# Altium PCB DVI_D_In.PcbDoc
Units mil, origin at the board's own origin, x right, y up, seen from the top; angles counter-clockwise.
Board outline 2004.6 x 2127 mil, 4 copper layers (Top Layer, Signal Layer 1, Signal Layer 2, Bottom Layer), stack 39.2 mil thick; 31 components, 57 nets, 267 pads, 90 vias.
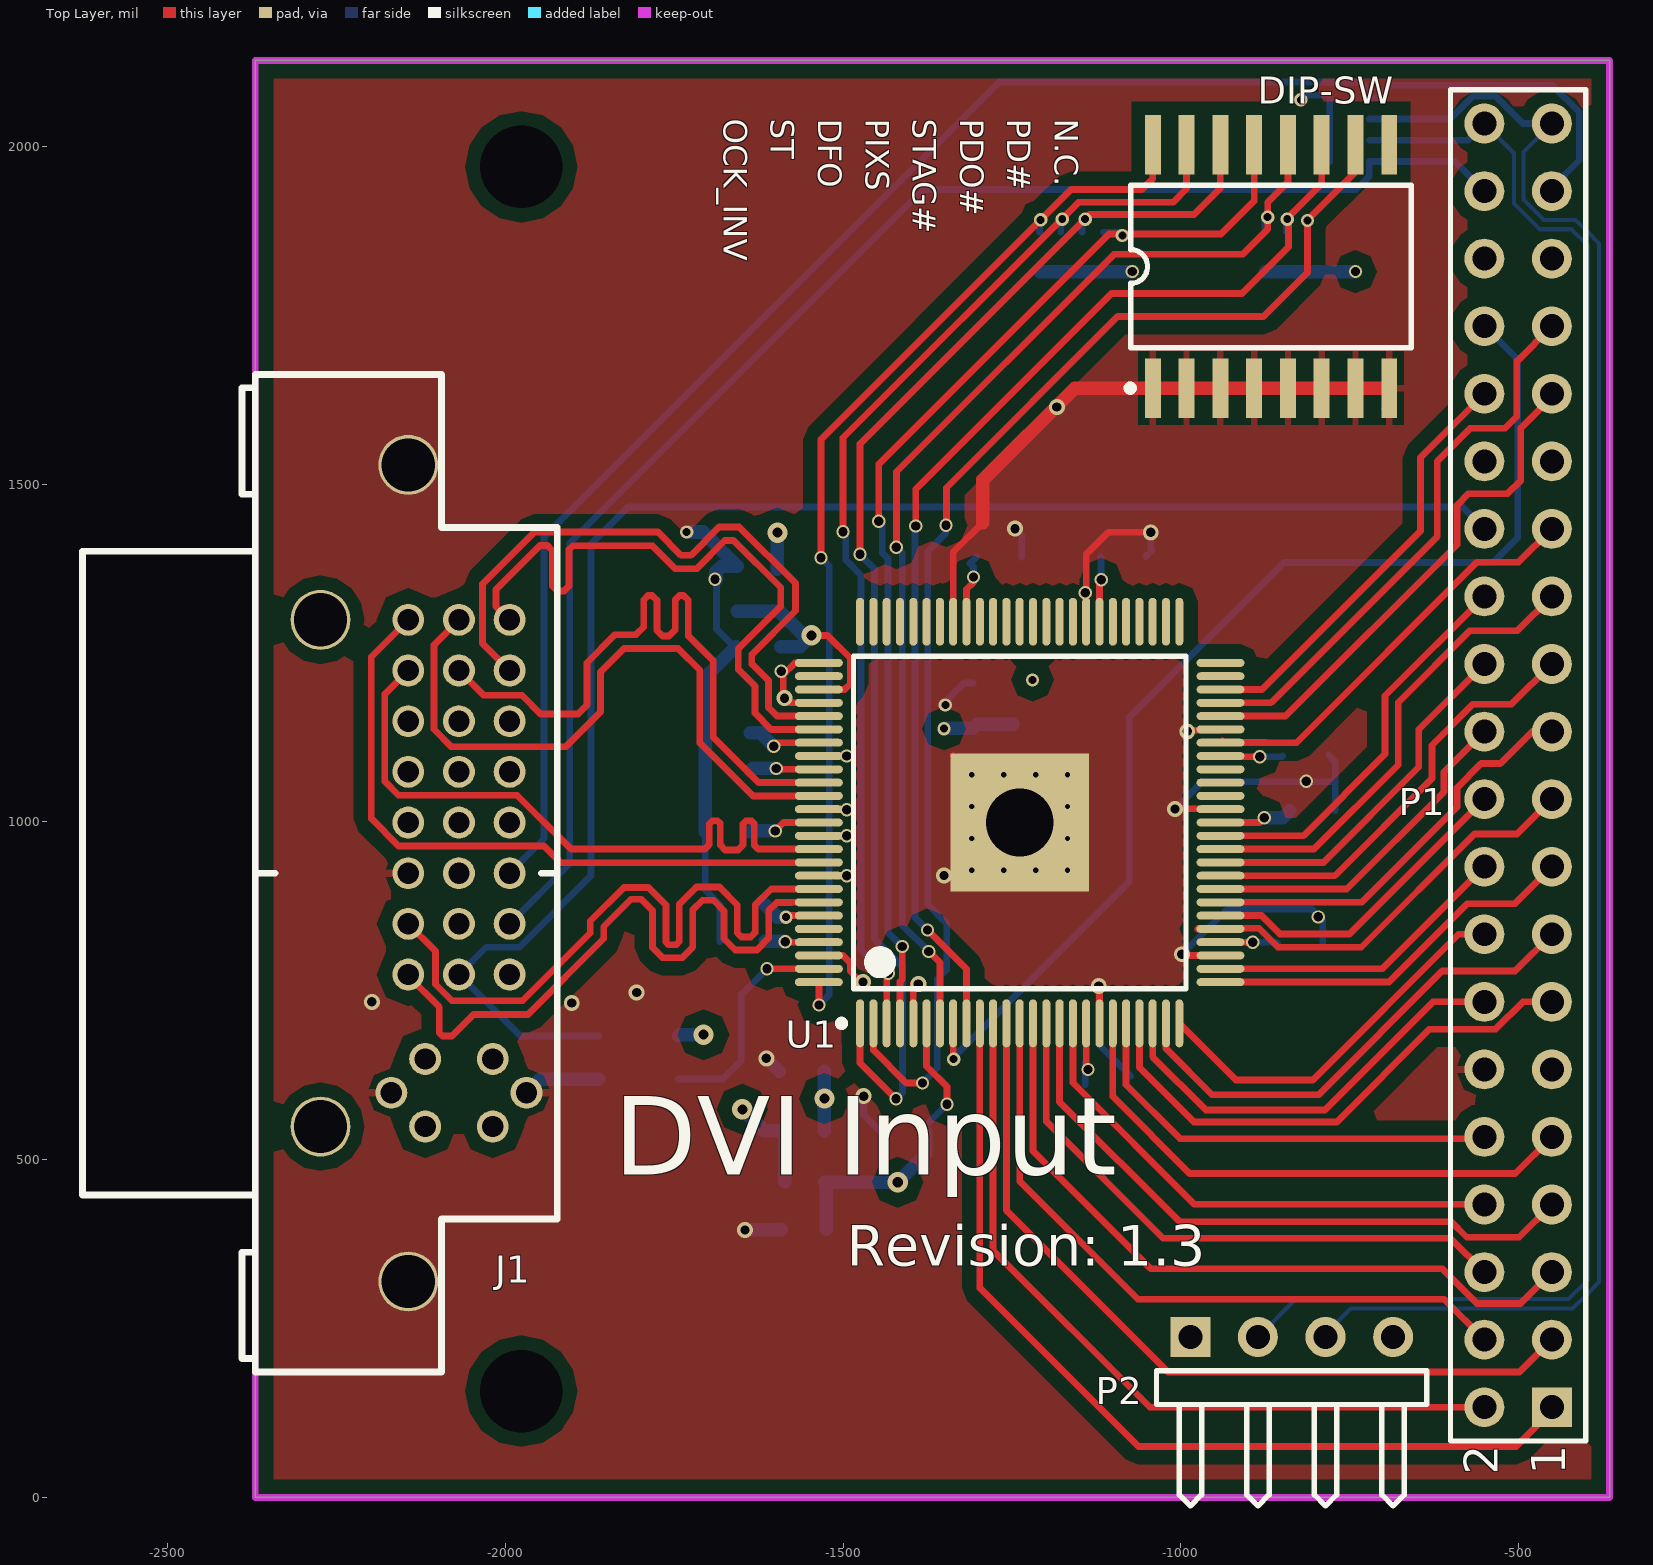
[diagram p0: Top Layer view]
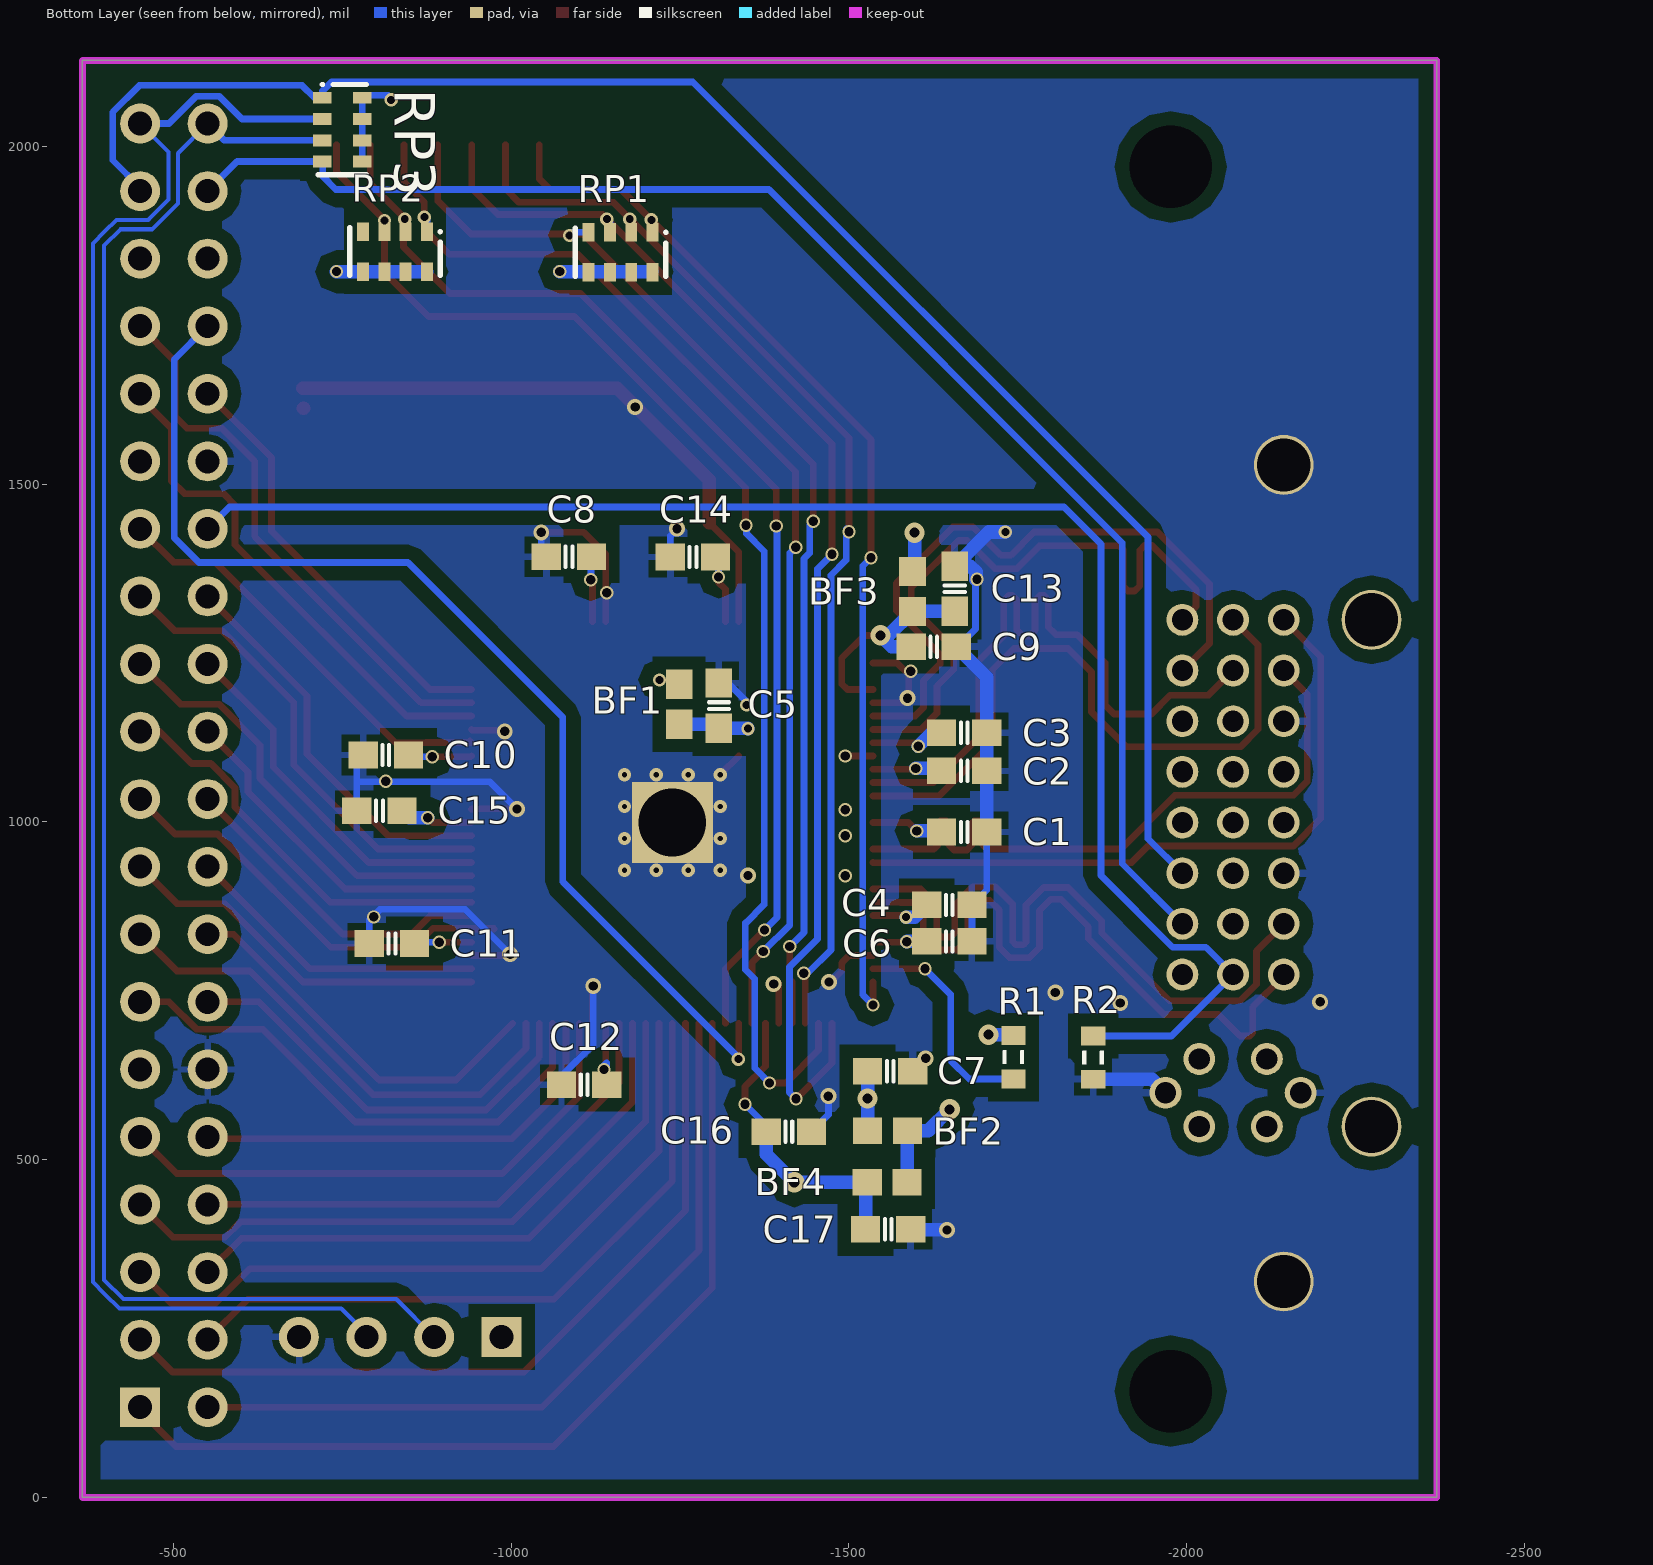
[diagram p1: Bottom Layer view, seen from below]
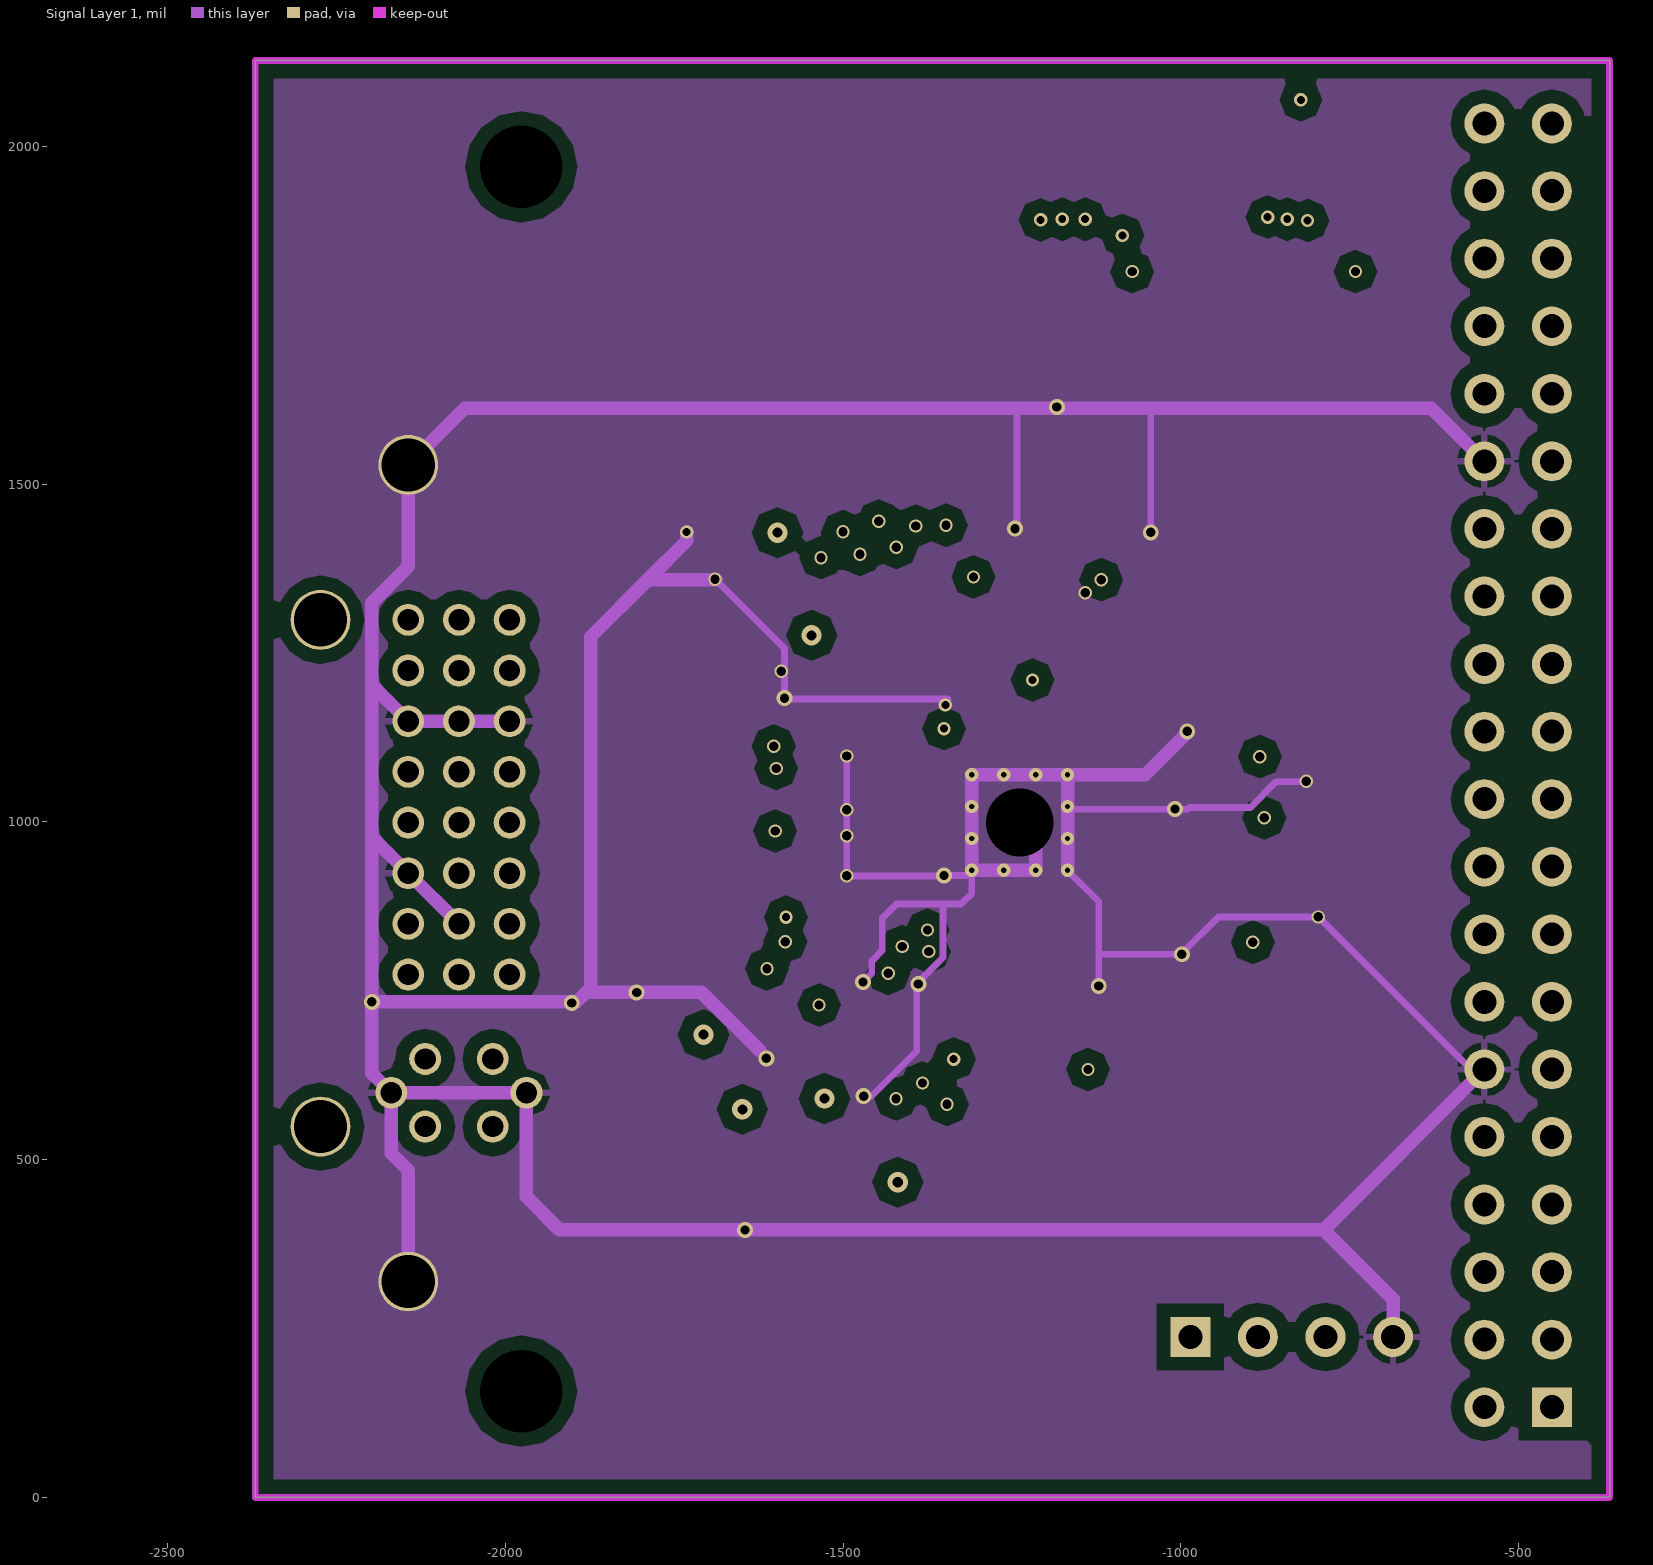
[diagram p2: Signal Layer 1]
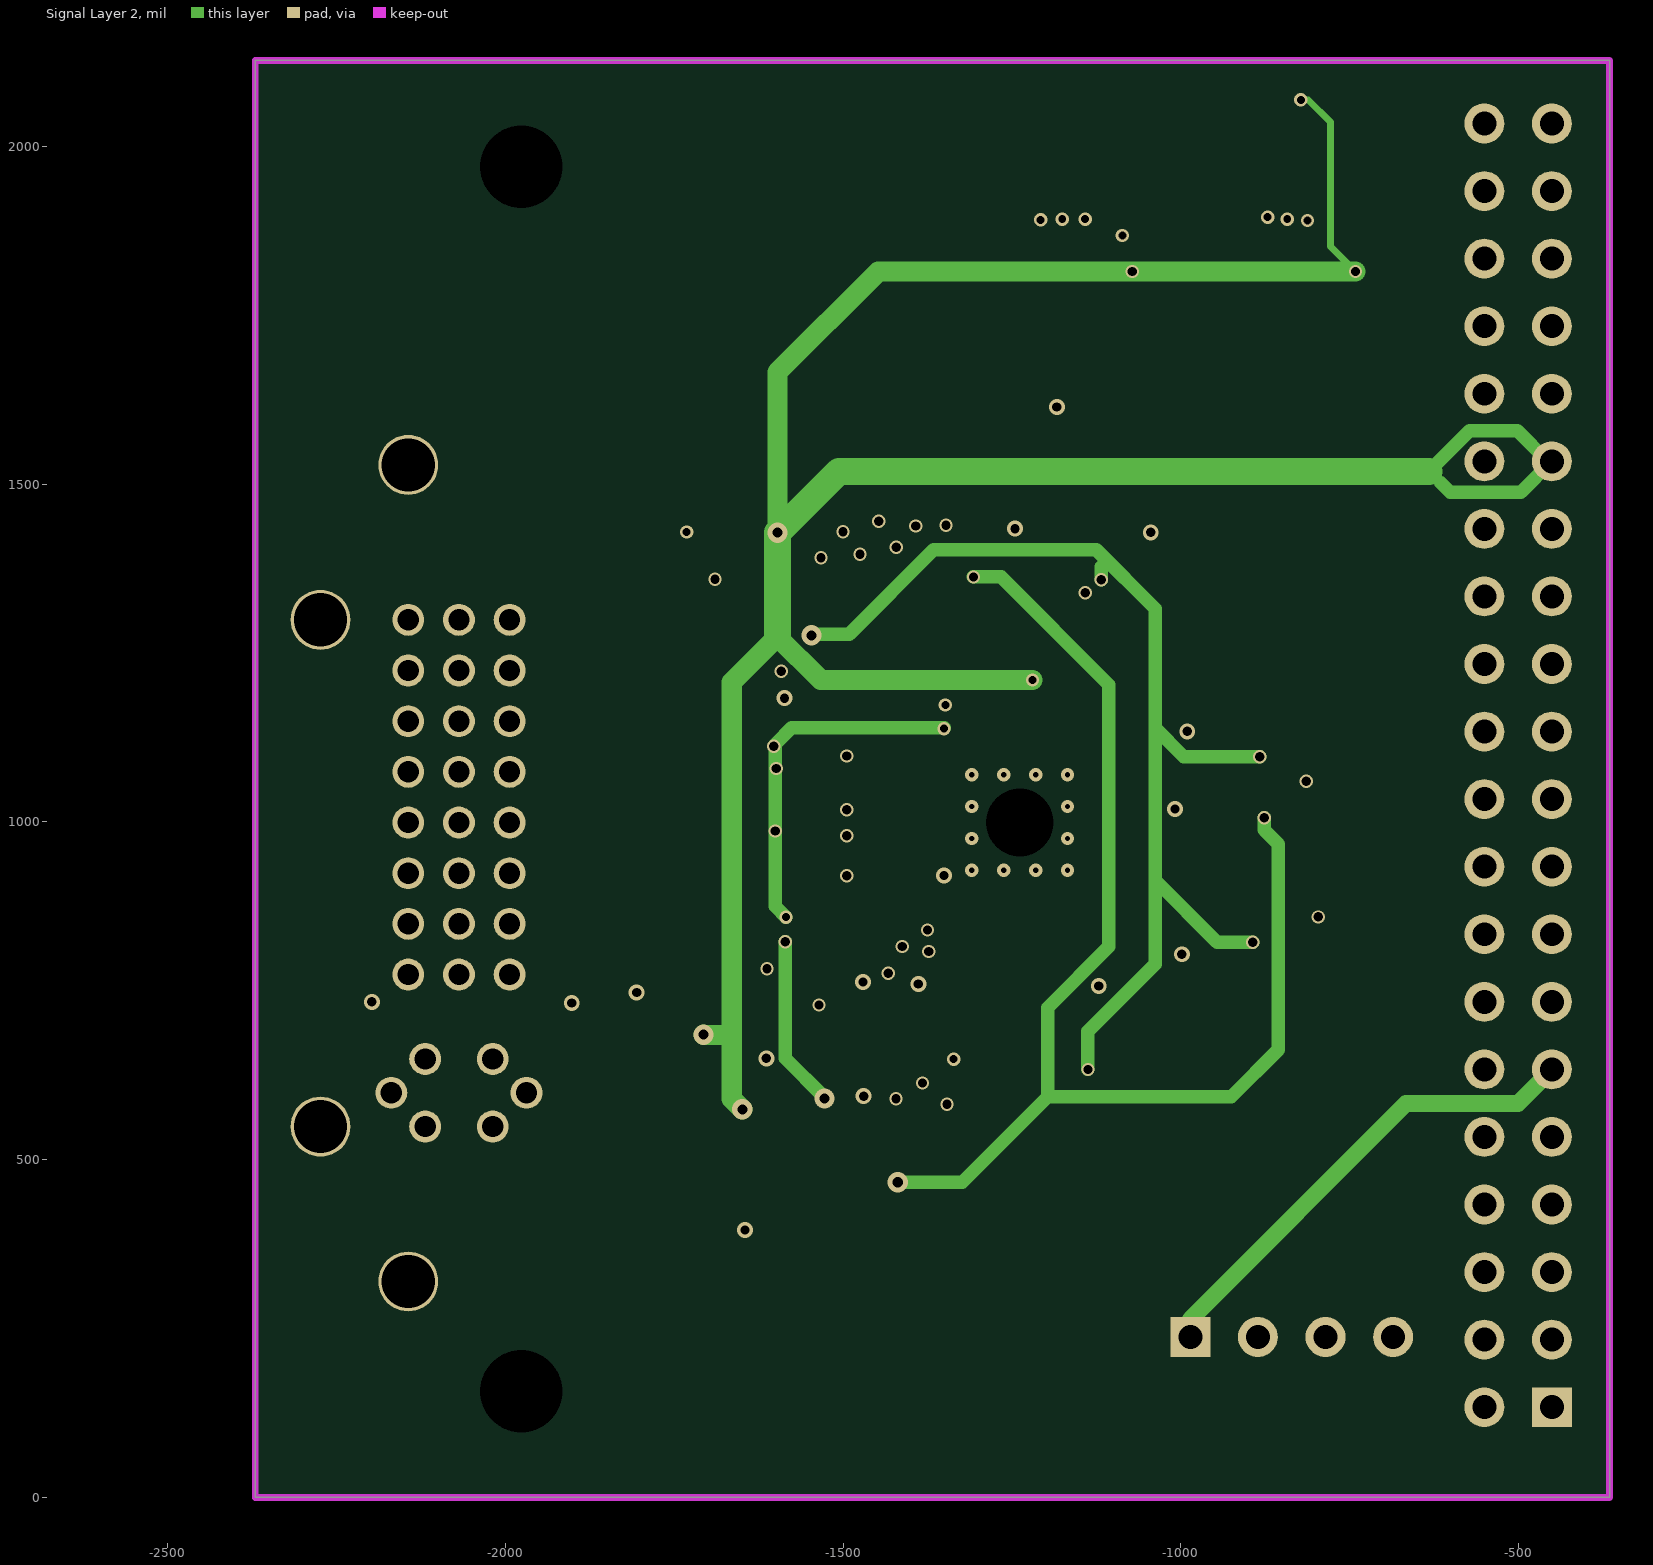
[diagram p3: Signal Layer 2]
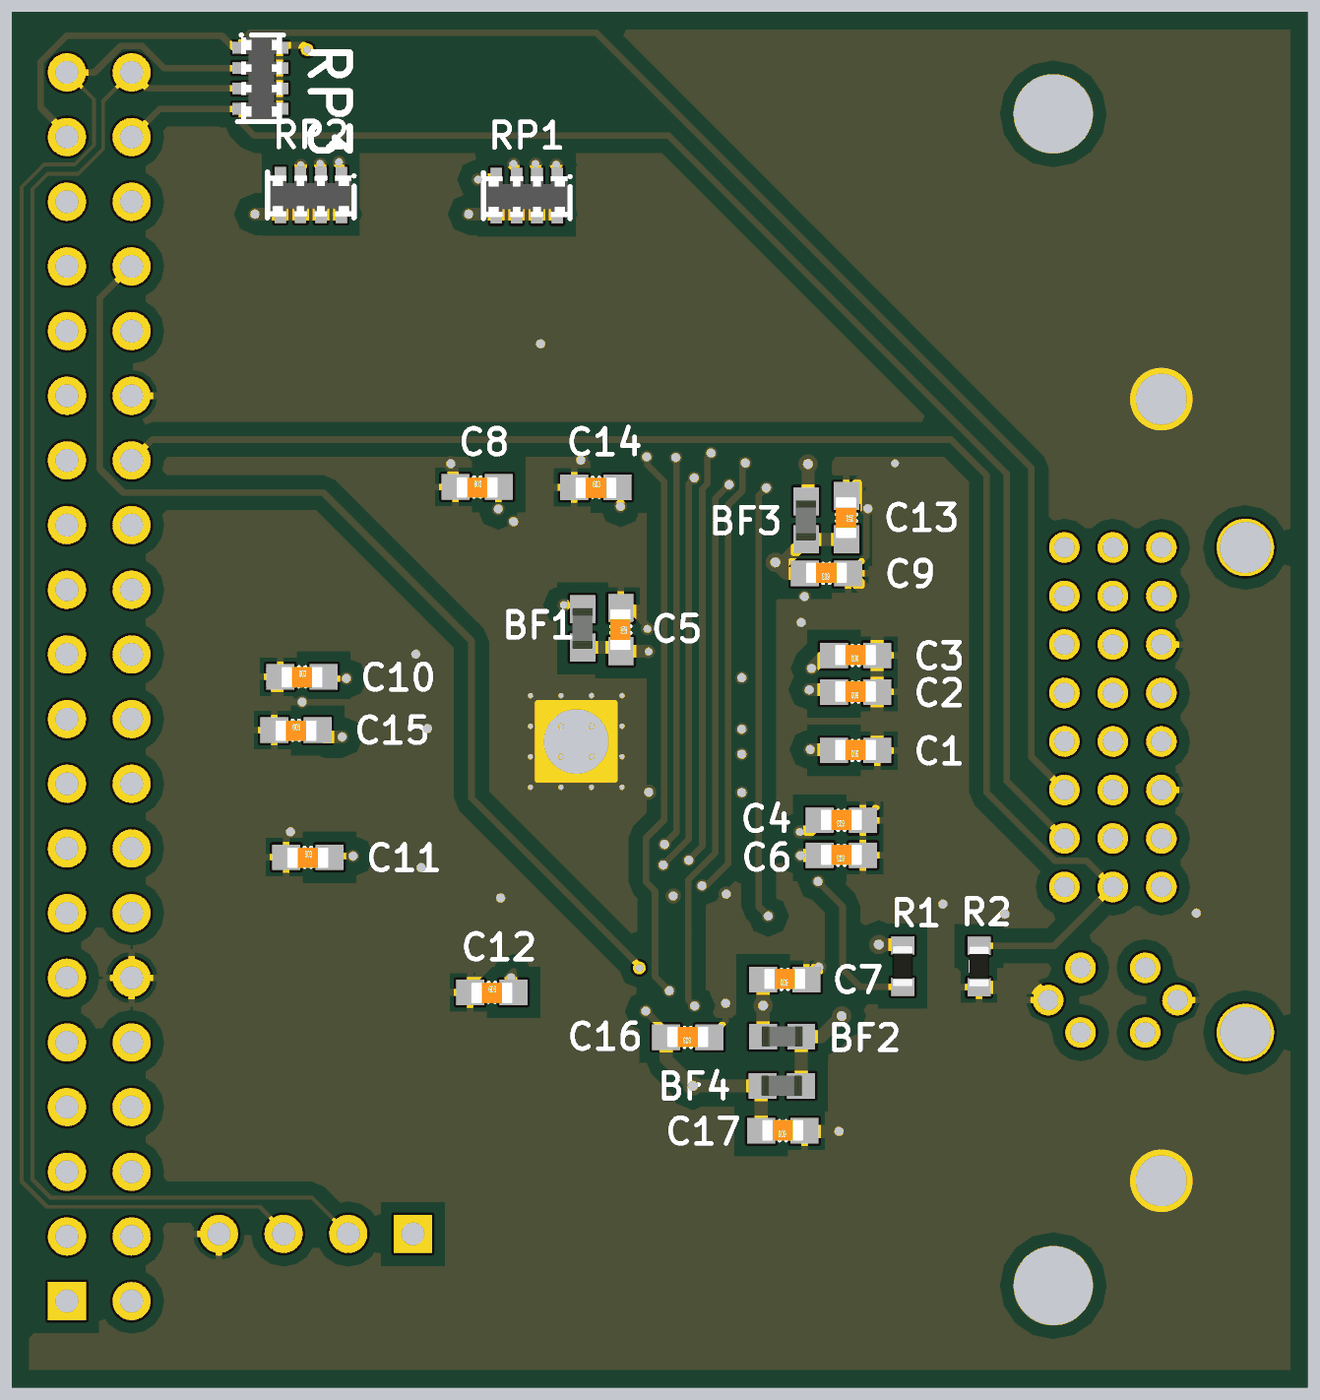
[diagram p4: 3D render of the assembled board from below, using the file's embedded part models]

## Layer stack, top to bottom
Top Solder: solder mask 0.4, Solder Resist, Dk 3.5
Top Layer: signal copper 1.4
Dielectric 1: core 15, FR-4, Dk 4.34
Signal Layer 1: signal copper 0.7
Dielectric 3: prepreg 5, Dk 4.2
Signal Layer 2: signal copper 0.7
Dielectric 2: core 15, FR-4, Dk 4.34
Bottom Layer: signal copper 1.4
Bottom Solder: solder mask 0.4, Solder Resist, Dk 3.5

## Board outline
-2370,0 -2370,2127 -365.4,2127 -365.4,0

## Design rules (kind name [scope] priority, off if disabled: settings)
Clearance "Poly and Signal" [InPoly] p1: gap=20
Clearance "Stitching GND" [IsStitchingVia and InNet('GND') vs (IsVia and (Not IsStitchingVia)) Or IsPad] p2: gap=5
Clearance [All] p3: gap=6
DiffPairsRouting [All] p1: maxlimit=10 minlimit=10 mostfreqgap=10 toplayer_minwidth=6 toplayer_maxwidth=15 toplayer_prefwidth=15 midlayer1_minwidth=6 midlayer1_maxwidth=15 midlayer1_prefwidth=15 midlayer2_minwidth=6 midlayer2_maxwidth=15 midlayer2_prefwidth=15 bottomlayer_minwidth=6 bottomlayer_maxwidth=15 bottomlayer_prefwidth=15 maxuncoupledlength=500
MinimumSolderMaskSliver [All] p1: minsoldermaskwidth=3
PolygonConnect PolygonConnect_2 [All vs IsVia  Or (IsPad And HoleSize > 50)] p1: connectstyle=Direct reliefconductorwidth=10 reliefentries=4 polygonreliefangle="90 Angle" airgapwidth=10
PolygonConnect [All] p2: connectstyle=Relief reliefconductorwidth=10 reliefentries=4 polygonreliefangle="90 Angle" airgapwidth=10
RoomDefinition DVI_D_In [InComponentClass('DVI_D_In')] p1 off: confinementstyle=ConfineIn formatcopy=TRUE lockcomponents=FALSE outline -3008.7,-44.4 572.9,-44.4 572.9,2356.5 -3008.7,2356.5
RoutingVias [All] p1: holewidth=28 width=50 viastyle="Through Hole" minholewidth=11.81 minwidth=19.68 maxholewidth=39.37 maxwidth=50
SilkToSilkClearance [All] p1: silktosilkclearance=6
SilkToSolderMaskClearance [IsPad] p1: minsilkscreentomaskgap=3 clearancetoexposedcopper=TRUE
SolderMaskExpansion [All] p1: expansion=4
Width Width_Diff [InNetClass('Diff')] p1: maxlimit=10 minlimit=10 preferedwidth=10 impedancedriven=TRUE minimp=50.000000 maximp=50.000000 favimp=50.000000
Width [All] p2: maxlimit=40 minlimit=6 preferedwidth=10
25 further rules are at their usual default settings.

## Classes and differential pairs
differential pair D2: +D2_P -D2_N
differential pair D1: +D1_P -D1_N
differential pair D0: +D0_P -D0_N
differential pair CLK: +CLK_P -CLK_N

## Components (designator, comment, footprint, x,y, rotation, side; value= is the part's Value field where it differs from the comment)
BF1 "GZ1608D121TF" L-1608[0603] -1248.5,1174 r270 bottom
BF2 "GZ1608D121TF" L-1608[0603] -1557,542.5 r0 bottom
BF3 "GZ1608D121TF" L-1608[0603] -1594,1341 r270 bottom
BF4 "GZ1608D121TF" L-1608[0603] -1556.5,466.5 r0 bottom
C1 "Cap Semi" C-1608[0603] -1670.5,985 r0 bottom
C2 "Cap Semi" C-1608[0603] -1670.5,1075.43 r0 bottom
C3 "Cap Semi" C-1608[0603] -1670.5,1132 r0 bottom
C4 "Cap Semi" C-1608[0603] -1648.5,877 r0 bottom
C5 "Cap Semi" C-1608[0603] -1307.5,1172 r270 bottom
C6 "Cap Semi" C-1608[0603] -1648.5,823 r0 bottom
C7 "Cap Semi" C-1608[0603] -1561,631 r0 bottom
C8 "Cap Semi" C-1608[0603] -1085.5,1392.5 r180 bottom
C9 "Cap Semi" C-1608[0603] -1625.5,1259 r0 bottom
C10 "Cap Semi" C-1608[0603] -814.5,1099 r180 bottom
C11 "Cap Semi" C-1608[0603] -823.5,820 r180 bottom
C12 "Cap Semi" C-1608[0603] -1108,611 r180 bottom
C13 "Cap Semi" C-1608[0603] -1656.5,1345 r270 bottom
C14 "Cap Semi" C-1608[0603] -1269,1392 r180 bottom
C15 "Cap Semi" C-1608[0603] -805,1016.5 r180 bottom
C16 "Cap Semi" C-1608[0603] -1411,541.5 r0 bottom
C17 "Cap Semi" C-1608[0603] -1558,397 r0 bottom
DIP-SW "DIP_SW" SO16W -866.5,1822 r0 top
J1 "DVI-I 24+5" DVI-I -2143.5,924 r90 top
P1 "DE2i_GPIO" HDR2X20 -450.8,133.6 r90 top
P2 "VGA_I2C" HDR1X4H -985.9,237.5 r0 top
R1 "Res_0603" RES_0603 -1743.5,651.5 r90 bottom
R2 "Res_0603" RES_0603 -1861.5,651 r90 bottom
RP1 "10K" R0603x4 -1162,1843 r0 bottom
RP2 "10K" R0603x4 -828,1844 r0 bottom
RP3 "10K" R0603x4 -750.1,2024.5 r270 bottom
U1 "TFP401APZP" PZP100-4700X4700TP_N -1238.5,999 r90 top

## Footprints (in the part's own frame and the unit in brackets; to place one, negate y for a bottom-side part, rotate by r counter-clockwise, add the part's x,y. Pads: shape width x height; smd on the part's side, far side on the other; paste and mask are expansions set on the pad)
C-1608[0603] [mm] "Chip Capacitor; Body 1.6 x 0.8 mm (LxW typ)"
  rect 1.1x1 smd: 1(-0.85,0) 2(0.85,0)
  silkscreen extent -0.13,-0.38 0.13,0.38, body extent -0.8,-0.42 0.8,0.38, height 0.29
DVI-I [mm]
  round 2.254 hole 2: 0(-15.35,0) 0(15.35,0) -1(-9.525,3.3) -1(9.525,3.3)
  round 1.2 hole 0.8: 1(9.525,-3.81) 2(7.62,-3.81) 3(5.715,-3.81) 4(3.81,-3.81) 5(1.905,-3.81) 6(0,-3.81) 7(-1.905,-3.81) 8(-3.81,-3.81) 9(9.525,-1.905) 10(7.62,-1.905) 11(5.715,-1.905) 12(3.81,-1.905) 13(1.905,-1.905) 14(0,-1.905) 15(-1.905,-1.905) 16(-3.81,-1.905) 17(9.525,0) 18(7.62,0) 19(5.715,0) 20(3.81,0) 21(1.905,0) 22(0,0) 23(-1.905,0) 24(-3.81,0) C1(-6.985,-3.175) C2(-9.525,-3.175) C3(-6.985,-0.635) C4(-9.525,-0.635) C5(-8.255,-4.445) C5(-8.255,0.635)
  silkscreen extent -18.75,-5.6 18.75,12.25
HDR1X4H [mm] "Connector; Header; 4 Position; Right Angle"
  rect 1.5x1.5 hole 0.9: 1(0,0)
  round 1.5 hole 0.9: 2(2.54,0) 3(5.08,0) 4(7.62,0)
  silkscreen extent -1.27,-6.35 8.89,-1.27
HDR2X20 [mm] "Connector; Header; 20x2 Position"
  rect 1.5x1.5 hole 0.9: 1(0,0)
  round 1.5 hole 0.9: 2(0,2.54) 3(2.54,0) 4(2.54,2.54) 5(5.08,0) 6(5.08,2.54) 7(7.62,0) 8(7.62,2.54) 9(10.16,0) 10(10.16,2.54) 11(12.7,0) 12(12.7,2.54) 13(15.24,0) 14(15.24,2.54) 15(17.78,0) 16(17.78,2.54) 17(20.32,0) 18(20.32,2.54) 19(22.86,0) 20(22.86,2.54) 21(25.4,0) 22(25.4,2.54) 23(27.94,0) 24(27.94,2.54) 25(30.48,0) 26(30.48,2.54) 27(33.02,0) 28(33.02,2.54) 29(35.56,0) 30(35.56,2.54) 31(38.1,0) 32(38.1,2.54) 33(40.64,0) 34(40.64,2.54) 35(43.18,0) 36(43.18,2.54) 37(45.72,0) 38(45.72,2.54) 39(48.26,0) 40(48.26,2.54)
  silkscreen extent -1.27,-1.27 49.53,3.81
L-1608[0603] [mm] "Chip Inductor, Body 1.6x0.8mm, IPC Medium Density"
  rect 1.1x1 smd: 1(-0.75,0) 2(0.75,0)
  body extent -0.8,-0.41 0.8,0.39, height 0.45
PZP100-4700X4700TP_N [mm] "Thin QFP, 100-Leads, Body 14x14mm, Pitch 0.5mm, Thermal Pad 5.2x5.2mm, IPC Medium Density"
  oval 1.8x0.3 smd: 1(-7.55,6) 2(-7.55,5.5) 3(-7.55,5) 4(-7.55,4.5) 5(-7.55,4) 6(-7.55,3.5) 7(-7.55,3) 8(-7.55,2.5) 9(-7.55,2) 10(-7.55,1.5) 11(-7.55,1) 12(-7.55,0.5) 13(-7.55,0) 14(-7.55,-0.5) 15(-7.55,-1) 16(-7.55,-1.5) 17(-7.55,-2) 18(-7.55,-2.5) 19(-7.55,-3) 20(-7.55,-3.5) 21(-7.55,-4) 22(-7.55,-4.5) 23(-7.55,-5) 24(-7.55,-5.5) 25(-7.55,-6) 51(7.55,-6) 52(7.55,-5.5) 53(7.55,-5) 54(7.55,-4.5) 55(7.55,-4) 56(7.55,-3.5) 57(7.55,-3) 58(7.55,-2.5) 59(7.55,-2) 60(7.55,-1.5) 61(7.55,-1) 62(7.55,-0.5) 63(7.55,0) 64(7.55,0.5) 65(7.55,1) 66(7.55,1.5) 67(7.55,2) 68(7.55,2.5) 69(7.55,3) 70(7.55,3.5) 71(7.55,4) 72(7.55,4.5) 73(7.55,5) 74(7.55,5.5) 75(7.55,6)
  oval 0.3x1.8 smd: 26(-6,-7.55) 27(-5.5,-7.55) 28(-5,-7.55) 29(-4.5,-7.55) 30(-4,-7.55) 31(-3.5,-7.55) 32(-3,-7.55) 33(-2.5,-7.55) 34(-2,-7.55) 35(-1.5,-7.55) 36(-1,-7.55) 37(-0.5,-7.55) 38(0,-7.55) 39(0.5,-7.55) 40(1,-7.55) 41(1.5,-7.55) 42(2,-7.55) 43(2.5,-7.55) 44(3,-7.55) 45(3.5,-7.55) 46(4,-7.55) 47(4.5,-7.55) 48(5,-7.55) 49(5.5,-7.55) 50(6,-7.55) 76(6,7.55) 77(5.5,7.55) 78(5,7.55) 79(4.5,7.55) 80(4,7.55) 81(3.5,7.55) 82(3,7.55) 83(2.5,7.55) 84(2,7.55) 85(1.5,7.55) 86(1,7.55) 87(0.5,7.55) 88(0,7.55) 89(-0.5,7.55) 90(-1,7.55) 91(-1.5,7.55) 92(-2,7.55) 93(-2.5,7.55) 94(-3,7.55) 95(-3.5,7.55) 96(-4,7.55) 97(-4.5,7.55) 98(-5,7.55) 99(-5.5,7.55) 100(-6,7.55)
  rect 5.2x5.2 / inner rect 0x0 / far side rect 3.048x3.048 hole 2.54: 101(0,0)
  silkscreen extent -7.67,-6.25 6.25,6.82, body extent -7,-7 7,7, height 1.2
R0603x4 [mm] "Chip Resistor Array, (0603x4); SM; 8 Leads; Body 3.40 x 1.80 mm (LxW max)"
  rect 0.45x0.7 smd: 1(-1.2,-0.75) 2(-0.4,-0.75) 3(0.4,-0.75) 4(1.2,-0.75) 5(1.2,0.75) 6(0.4,0.75) 7(-0.4,0.75) 8(-1.2,0.75)
  silkscreen extent -1.75,-0.9 1.7,0.9, body extent -1.6,-0.76 1.6,0.84, height 0.65
RES_0603 [mil]
  rect 28x36 smd: 1(-32,0) 2(32,0)
  silkscreen extent -10,-16 10,16, body extent -31,-16 32,16, height 20
SO16W [mm] "Small Outline; 16 Leads; Body Width 7.5 mm; Pitch 1.27 mm"
  rect 0.6x2.25 smd: 1(-4.445,-4.575) 2(-3.175,-4.575) 3(-1.905,-4.575) 4(-0.635,-4.575) 5(0.635,-4.575) 6(1.905,-4.575) 7(3.175,-4.575) 8(4.445,-4.575) 9(4.445,4.575) 10(3.175,4.575) 11(1.905,4.575) 12(0.635,4.575) 13(-0.635,4.575) 14(-1.905,4.575) 15(-3.175,4.575) 16(-4.445,4.575)
  silkscreen extent -5.42,-4.7 5.27,3.05

## Part data
BF1 BF2 BF3 BF4: library part Inductor
C1 C2 C3 C4 C5 C6 C7 C8 C9 C10 C11 C12 C13 C14 C15 C16 C17: "Capacitor (Semiconductor SIM Model)"
J1: library part DVI-I
P1: library part "Header 20X2", "Header, 20-Pin, Dual row"
P2: library part "Header 4H", "Header, 4-Pin, Right Angle"
R1 R2: "Resistor"
RP1 RP2 RP3: library part RPACK4
U1: library part CMP-0325-00069-1, "PanelBus DVI Receiver 165 MHz, HSYNC Fix with 3 Data Channels, 3.3 V, 0 to +70 degC, 100-pin HTQFP (PZP), Green (RoHS & no Sb/Br)"

## Free pads (board coordinates)
  round 0 hole 122.05: 0(-1976.3,157.48) 0(-1976.3,1969.52)

## Via types
v1: diameter 19.68, hole 13.78, Top Layer to Bottom Layer, 37 vias
v2: diameter 23.62, hole 13.78, Top Layer to Bottom Layer, 17 vias
v3: diameter 19.68, hole 7.87, Top Layer to Bottom Layer, 16 vias
v4: diameter 19.68, hole 11.81, Top Layer to Bottom Layer, 14 vias
v5: diameter 30, hole 15, Top Layer to Bottom Layer, 6 vias

## Nets (pads, with @x,y where several pads share a name; then routed paths per layer and width w, separated by ;. In a path a pad name is that pad's centre, name@x,y a point inside that pad or via, vN(x,y) a via of type N, cw(c..) or ccw(c..) an arc to the next point about the centre after c; other vN are vias at no path point)
+3.3V: BF1.1 BF2.1 BF3.1 BF4.1 P1.29 R1.2 RP1.5 RP1.6 RP1.7 RP1.8 RP2.5 RP2.6 RP2.7 RP2.8 RP3.5 RP3.6 RP3.7 RP3.8 | length 4847.7
  Signal Layer 2 w10: v4(-822.3,2068.7) -811.4,2068.7 -778.6,2035.9 -778.6,1851.6 v1(-741.47,1814.47)
  Signal Layer 2 w20: -632.7,1518.9 -572.47,1579.13 -502.23,1579.13 -456.7,1533.6 P1.29 -496.6,1487.8 -601.2,1487.8 -615.2,1501.8
  Signal Layer 2 w30: v5(-1706.5,685) -1706,684.5 -1664.5,684.5 ; v5(-1649,574.5) -1664.5,590 -1664.5,684.5 ; v5(-1597,1428) -1597,1665.5 -1448.03,1814.47 v1(-1072.03,1814.47) v1(-741.47,1814.47) ; v4(-1219.5,1210) -1533,1210 -1597,1274 -1664.5,1206.5 -1664.5,684.5
  Signal Layer 2 w40: -1597,1274 v5(-1597,1428) -1506.1,1518.9 -632.7,1518.9
  Bottom Layer w10: v4@-818.2,2075.5 -783.38,2075.5 RP3.8 RP3.7 RP3.6 RP3.5
  Bottom Layer w20: R1.2 -1742,685 v5(-1706.5,685) ; v5(-1649,574.5) -1617,542.5 BF2.1 BF4.1@-1586.53,467 ; BF3.1@-1597,1373.53 v5(-1597,1428) ; RP1.8@-1208.24,1814.47 v1(-1072.03,1814.47) ; RP2.8 RP2.7 RP2.6 RP2.5 v1(-741.47,1814.47)
+5V: P1.11 P2.1 | length 714.6
  Signal Layer 2 w25: P2.1 -985.9,263.8 -666.5,583.2 -501.2,583.2 P1.11
AVDD: BF1.2 C1.2 C2.2 C3.2 C4.2 C5.2 U1.82 U1.84 U1.88 U1.95 | length 1035.1
  Top Layer w10: v1@-1602.5,1117.11 U1.82 ; v1(-1600.5,986.5) -1588,999 U1.88 ; v1(-1599,1079) -1597.74,1077.74 U1.84 ; v4(-1584.5,859) -1582.3,861.2 U1.95
  Signal Layer 2 w20: v4(-1584.5,859) -1600.5,875 v1(-1600.5,986.5) -1600.5,1115 -1576,1139.5 v4@-1350.5,1139.5
  Bottom Layer w20: C1.2 -1635.54,986.5 v1(-1600.5,986.5) ; C2.2 -1633.46,1079 v1(-1599,1079) ; C3.2 -1622.5,1132 v1(-1602.5,1112) ; C4.2 -1597.04,859 v4(-1584.5,859) ; v4(-1350.5,1138) -1349.97,1138.54 C5.2 -1301.56,1144.47 BF1.2
B0: P1.1 U1.10 | length 1362.8
  Top Layer w10: U1.10 -1297.56,310.08 -1062.88,75.4 -503.8,75.4 -450.8,128.4 P1.1
B1: P1.2 U1.11 | length 1159.4
  Top Layer w10: U1.11 -1277.87,365.47 -1046,133.6 P1.2
B2: P1.3 U1.12 | length 1203
  Top Layer w10: U1.12 -1258.19,424.99 -1019,185.8 -498.6,185.8 P1.3
B3: P1.4 U1.13 | length 1018.3
  Top Layer w10: U1.13 -1238.5,468.5 -1063.37,293.37 -610.57,293.37 P1.4
B4: P1.5 U1.14 | length 1069.6
  Top Layer w10: U1.14 -1218.82,512.82 -1044.62,338.62 -613.14,338.62 -561.71,287.2 -497.2,287.2 P1.5
B5: P1.6 U1.15 | length 885.8
  Top Layer w10: U1.15 -1199.13,556.63 -1026.03,383.53 -600.73,383.53 P1.6
B6: P1.7 U1.16 | length 948
  Top Layer w10: U1.16 -1179.45,585.44 -1002.2,408.2 -599.9,408.2 -576.8,385.1 -499.3,385.1 P1.7
B7: P1.8 U1.17 | length 771.5
  Top Layer w10: U1.17 -1159.76,613.81 -979.77,433.82 -551.02,433.82 P1.8
CLK_N: J1.24 U1.94 | length 1006.6
  Top Layer w10: J1.24 -2143.5,771.75 -2097.5,725.75 -2097.5,687.68 -2092.82,683 -2078.98,683 -2046.98,715 -1966.22,715 -1854.11,827.11 -1854.11,844.89 -1813.5,885.5 -1798.79,885.5 -1782,868.72 -1782,813.72 -1767.29,799 -1737.72,799 -1722.5,814.22 -1722.5,869.5 -1708,884 -1691.79,884 -1676,868.22 -1676,827 -1659.5,810.5 -1627.5,810.5 -1610,828 -1610,868.73 -1598,880.73 -1576.34,880.73 -1576.18,880.89 U1.94
CLK_P: J1.23 U1.93 | length 1006.8
  Top Layer w10: J1.23 -2103.12,808.62 -2103.12,759.66 -2078.61,735.14 -1974.36,735.14 -1874.11,835.39 -1874.11,853.18 -1824.29,903 -1788,903 -1762,877 -1762,822 -1758,818 -1747,818 -1742.5,822.5 -1742.5,877.78 -1716.79,903.5 -1683,903.5 -1656.5,877 -1656.5,835.78 -1650.43,829.72 -1636.57,829.72 -1630,836.28 -1630,877.02 -1606.29,900.73 -1576.34,900.73 -1576.18,900.57 U1.93
D0_N: J1.17 U1.91 | length 1006.4
  Top Layer w10: J1.17 -2198.12,1244.38 -2198.12,1004.66 -2157.84,964.38 -1942.88,964.38 -1918.13,939.63 -1536.06,939.63 U1.91
D0_P: J1.18 U1.90 | length 1006.5
  Top Layer w10: J1.18 -2178.12,1189.38 -2178.12,1059.66 -2157.84,1039.38 -1982.38,1039.38 -1902.63,959.63 -1704.5,959.63 -1698.13,966 -1698.13,997 ; -1698,997 -1693.5,1001.5 -1685.5,1001.5 -1681.57,997.57 ; -1681.63,997.5 -1681.63,965.5 -1674.63,958.5 -1655.5,958.5 -1648,966 -1648,997 -1643.5,1001.5 -1635.5,1001.5 -1631.5,997.5 -1631.5,965.5 -1625.63,959.63 U1.90
D1_N: J1.9 U1.86 | length 1006.4
  Top Layer w10: J1.9@-2068.31,1298.81 J1.9 -2105.5,1262 -2105.5,1137.04 -2079.46,1111 -1910.72,1111 -1859,1162.72 -1859,1221.72 -1824.22,1256.5 -1744,1256.5 -1711.93,1224.43 -1711.93,1116.86 -1633.29,1038.21 -1576.34,1038.21 -1576.18,1038.37 U1.86
D1_P: J1.10 U1.85 | length 1006.4
  Top Layer w10: J1.10 -2032,1187.5 -1975.5,1187.5 -1947.64,1159.64 -1892.14,1159.64 -1879,1172.78 -1879,1235.5 -1837.5,1277 -1806.5,1277 -1795,1288.5 -1795,1328.5 -1788.5,1335 -1782.5,1335 -1775.5,1328 ; -1775.5,1328.5 -1775.5,1328 ; U1.85 -1576.18,1058.06 -1576.34,1058.21 -1590.31,1058.21 -1590.37,1058.16 -1607.63,1058.16 -1607.69,1058.21 -1625,1058.21 -1691.93,1125.14 -1691.93,1237.93 -1729,1275 -1729,1328 -1736,1335 -1742,1335 -1748.5,1328.5 -1748.5,1284 -1757.5,1275 -1767,1275 -1775.5,1283.5 -1775.5,1328
D2_N: J1.1 U1.81 | length 1006.6
  Top Layer w10: J1.1 -2013.5,1319 -2013.5,1344 -1948.5,1409 -1937.5,1409 -1930.5,1402 -1930.5,1349.5 -1922.75,1341.75 -1912.75,1341.75 -1905.5,1349 -1905.5,1403 -1900,1408.5 -1781.79,1408.5 -1747.79,1374.5 -1717,1374.5 -1675,1416.5 -1662,1416.5 -1592,1346.5 -1592,1319.28 -1655,1256.28 -1655,1225.5 -1630.3,1200.8 -1630.3,1160.8 -1606.3,1136.8 U1.81
D2_P: J1.2 U1.80 | length 1006.6
  Top Layer w10: J1.2 -2033.5,1264 -2033.5,1352.28 -1956.79,1429 -1774,1429 -1739.5,1394.5 -1725.29,1394.5 -1683.29,1436.5 -1653.72,1436.5 -1570.5,1353.28 -1570.5,1312.5 -1635,1248 -1635,1233.78 -1610.3,1209.08 -1610.3,1169.08 -1598.01,1156.8 U1.80@-1535.75,1156.8
DE: P1.31 U1.46 | length 770.6
  Top Layer w10: U1.46 -844.94,1156.48 -591.33,1410.09 -591.33,1468.47 -574.1,1485.7 -516.2,1485.7 -496.7,1505.2 -496.7,1583.17 -450.8,1629.07 P1.31
DFO: DIP-SW.14 RP1.3 U1.1 | length 1900
  Top Layer w10: v1(-1475,1396) -1475,1559.5 v4@-1142,1892.5 ; U1.1 -1474.72,643.22 v1(-1421.5,590) ; v4@-1135.5,1899 -980.5,1899 -941.5,1938 DIP-SW.14
  Bottom Layer w10: v1(-1475,1396) -1453.5,1374.5 -1453.5,826.5 -1412,785 -1412,599.5 v1(-1421.5,590) ; RP1.3 -1146.25,1887.25 v4(-1141.5,1892)
DVDD: BF4.2 C14.2 C15.2 C16.2 C17.2 U1.6 U1.38 U1.67 | length 2579.8
  Top Layer w10: U1.6 -1376.3,638.3 -1346,608 v1(-1346,582) ; U1.67 -1317.24,1344.26 -1307,1354.5 v1(-1307,1362.5) ; U1.38 -883.5,999 v1(-876.5,1006)
  Signal Layer 2 w20: v5(-1419,466.5) -1323.5,466.5 -1197,593 ; v1(-1307,1362.5) -1266,1362.5 -1106.5,1203 -1106.5,815.5 -1197,725 -1197,593 ; v1(-876.5,1006) -876.5,988 -855.5,967 -855.5,663 -925.5,593 -1197,593
  Bottom Layer w10: C16.2 -1377.54,550.46 v1(-1346,582) ; v1(-1307,1362.5) -1307,1377.46 -1312,1382.46 C14.2
  Bottom Layer w20: BF4.2 v5(-1419,466.5) -1377.54,507.96 C16.2 ; C17.2 BF4.2@-1524.54,464.06 ; v1(-876.5,1006) -848.97,1006 C15.2
G0: P1.9 U1.20 | length 828
  Top Layer w10: U1.20 -1100.71,593.21 -986.9,479.4 -505,479.4 P1.9
G1: P1.10 U1.21 | length 655.3
  Top Layer w10: U1.21 -1081.02,610.82 -1001.2,531 -553.4,531 P1.10
G2: P1.13 U1.22 | length 783
  Top Layer w10: U1.22 -1061.34,636.33 -980.8,555.8 -769.12,555.8 -631.85,693.07 -534.01,693.07 -493.49,733.6 P1.13
G3: P1.14 U1.23 | length 639.3
  Top Layer w10: U1.23 -1041.65,652.15 -963.05,573.55 -786.87,573.55 -626.82,733.6 P1.14
G4: P1.15 U1.24 | length 735.2
  Top Layer w10: U1.24 -1021.97,664.46 -953.5,596 -796.42,596 -613.22,779.2 -505.2,779.2 P1.15
G5: P1.16 U1.25 | length 575.4
  Top Layer w10: U1.25 -918.56,618.04 -804.66,618.04 -589.1,833.6 P1.16
G6: P1.17 U1.26 | length 561.2
  Top Layer w10: U1.26 -691.92,762.78 -575.8,878.9 -505.5,878.9 P1.17
G7: P1.18 U1.27 | length 453.1
  Top Layer w10: U1.27 -701.94,782.46 P1.18
GND: C1.1 C2.1 C3.1 C4.1 C5.1 C6.1 C7.1 C8.1 C9.1 C10.1 C11.1 C12.1 C13.1 C14.1 C15.1 C16.1 C17.1 DIP-SW.1 DIP-SW.2 DIP-SW.3 DIP-SW.4 DIP-SW.5 DIP-SW.6 DIP-SW.7 DIP-SW.8 J1.0 J1.3 J1.11 J1.15 J1.19 J1.22 J1.C5 P1.12 P1.30 P2.4 R2.1 U1.5 U1.19 U1.28 U1.39 U1.45 U1.58 U1.68 U1.76 U1.79 U1.83 U1.87 U1.89 U1.92 U1.98 U1.101 | length 14466.3
  Top Layer w10: U1.98 -1500.15,802.15 -1490.5,792.5 -1490.5,791.85 -1489.31,790.66 -1489.31,778.81 -1473.5,763 v2(-1470.5,763) ; U1.83 v1(-1494.5,1097.43) ; U1.79 -1579.67,1176.17 v2(-1586.5,1183) -1588.5,1185 -1588.5,1218 -1571.28,1235.22 U1.76 ; U1.5 -1395.98,760.52 -1395.5,761 v2@-1391,761 ; v2@-1350.74,920.26 v2(-1350.5,920.5) ; U1.101@-1336.93,1097.43 v3(-1309.37,1069.87) ; U1.68 -1336.93,1399.07 -1293,1443 ; U1.101@-1313.3,979.32 v3(-1309.37,975.38) ; U1.101@-1313.3,1018.68 v3(-1309.37,1022.62) ; U1.58 -1140.08,1395.93 -1107.5,1428.5 v2(-1044.5,1428.5) ; v2@-1121.5,760.5 -1120.39,759.39 U1.19 ; v2@-1008.5,1019.5 -942.07,1019.5 U1.39 ; v2@-999.5,804 -997.65,802.15 U1.28 ; v2@-990.5,1135.5 -942.55,1135.5 U1.45
  Top Layer w20: -1293,1443 -1293,1506 -1157.12,1641.88 DIP-SW.1 DIP-SW.2 DIP-SW.3 DIP-SW.4 DIP-SW.5 DIP-SW.6 DIP-SW.7 DIP-SW.8 ; DIP-SW.8@-693,1612 DIP-SW.8@-692.5,1612.5
  Signal Layer 1 w10: v1@-1688,1358 -1586.5,1256.5 v2(-1586.5,1183) -1585.5,1182 -1344.5,1182 -1348.5,1178 v4(-1348.5,1173) ; v1(-1494.5,1097.43) v1(-1494.5,1018) v1(-1494.5,979.32) v1(-1494.5,920) -1351,920 v2(-1350.5,920.5) -1317,920.5 v3(-1309.37,928.13) -1309.37,894.13 -1325.16,878.34 -1420.66,878.34 -1442,857 -1442,809.68 -1457.34,794.34 -1457.34,776.16 v2(-1470.5,763) ; v2(-1469.5,594) -1457.5,594 -1391,660.5 -1391,761 -1390.53,761 -1352.16,799.37 -1352.16,873.34 ; v2(-1245.5,1434) -1245.5,1433 -1242.5,1430 -1242.5,1612 ; v3(-1167.63,928.13) -1121.5,882 -1121.5,804 ; v3@-1160.82,1018.68 -989.69,1018.68 -987.03,1021.34 -897.16,1021.34 -859,1059.5 v1@-816,1059.5 ; v2(-1121.5,757) -1121.5,804 ; v2(-1044.5,1428.5) -1044.5,1609 -1043,1610.5 -1043,1612 ; P1.12 -570.8,633.6 v1(-796.5,859.3) -944.2,859.3 -999.5,804 -1121.5,804
  Signal Layer 1 w20: J1.0@-2143.5,319.67 -2143.5,484.5 -2168.5,509.5 J1.C5@-2168.5,599 ; J1.15 J1.22 -2197.5,978 ; J1.3 J1.11 J1.19 -2197.5,1203 ; -1873.5,752 -1873.5,1274 -1789.5,1358 ; v4(-1731.5,1429) -1731.5,1416 -1789.5,1358 ; v1@-1688,1358 -1789.5,1358 ; -1623,661 -1709.5,747.5 v2(-1805.5,747.5) -1880,747.5 -1894,733.5 v2(-2197.5,733.5) ; v3(-1262.12,975.38) v3(-1262.12,1022.62) v3(-1214.88,1022.62) v3(-1214.88,975.38) v3(-1214.88,928.13) v3(-1262.12,928.13) v3(-1309.37,928.13) v3(-1309.37,975.38) v3(-1309.37,1022.62) v3(-1309.37,1069.87) v3(-1262.12,1069.87) v3(-1214.88,1069.87) v3(-1167.63,1069.87) ; v3(-1167.63,928.13) v3(-1167.63,975.38) v3(-1167.63,1022.62) v3(-1167.63,1069.87) ; v2(-990.5,1134) -990.5,1132 -1052.63,1069.87 v3(-1167.63,1069.87) ; P2.4 -685.9,293.5 -788.4,396 ; P1.12 -788.4,396 ; P1.30 -629.2,1612 -1043,1612 -1242.5,1612 -2059.83,1612 -2143.5,1528.33 -2143.5,1378 -2197.5,1324 -2197.5,1203 ; v2(-2197.5,733.5) -2197.5,978 ; v2(-2197.5,733.5) -2197.5,628 J1.C5@-2168.5,599 ; -2197.5,978 -2197.5,1203 ; J1.C5@-2168.5,599 -1968.5,599 -1968.5,445 -1919.5,396 v2(-1645,396) -788.4,396
  Bottom Layer w10: C1.1 -1703.97,899 C4.1 C6.1 ; v1@-1688,1358 -1687.19,1357.19 -1687.19,1285.33 -1660.86,1259 C9.1 ; v2(-1469.5,594) -1469.5,566.54 C16.1 ; v4(-1348.5,1173) -1348.5,1178 -1321.04,1205.46 C5.1 ; v2(-1245.5,1434) -1245.5,1433 -1235.54,1423.04 C14.1 ; v2(-1121.5,757) -1121.5,670.5 C12.1@-1074.54,623.54 ; C8.1 -1043,1401.54 -1044.5,1403.04 v2(-1044.5,1428.5) ; v2(-1008.5,1019) -968,1059.5 -771.54,1059.5 ; v2(-998.5,804) -932,870.5 -806,870.5 -790.04,854.54 C11.1 ; C10.1 -771.54,1089.5 -771.54,1059.5 ; C15.1 -771.54,1059.5
  Bottom Layer w20: J1.C5@-1968.5,599 -1948.5,619 R2.1 ; v4(-1731.5,1429) -1707.04,1429 C13.1 -1679.54,1378.46 -1688,1370 v1@-1688,1358 ; C1.1 C2.1 C3.1 -1703.97,1214 C9.1 ; v2(-1645,396) -1592.47,396 C17.1 ; v2(-1613.47,650) C7.1
  other v1: -814.5,1060 -1591.5,1223 -1141.5,1339 -1689.5,1359
  other v2: -1901.5,732 -1388.5,760 -1183.5,1614
HPD: J1.16 P1.28 R2.2 | length 2349.6
  Bottom Layer w10: R2.2 -1977.5,683 J1.16 -2028.12,814.38 -1979.16,814.38 -1873,920.54 -1873,1411 -1818.16,1465.84 -583.04,1465.84 P1.28
HYNC: P1.32 U1.48 | length 635.4
  Top Layer w10: U1.48 -879.95,1195.85 -645.3,1430.5 -645.3,1539.1 P1.32
I2C2_CLK: P1.39 P2.3 RP3.2 | length 2548
  Bottom Layer w6: P2.3 -785.9,242.1 -748.5,279.5 -420.2,279.5 -398.3,301.4 -380.9,318.8 -380.9,1856.2 -398.3,1873.6 -415.8,1891.1 -462.8,1891.1 -492.8,1921.1 -492.8,1991.6 P1.39
  Bottom Layer w10: RP3.2 -601.47,2040.25 -567.59,2074.13 -534.01,2074.13 -493.49,2033.6 P1.39
I2C2_DATA: P1.40 P2.2 RP3.3 | length 2506.3
  Bottom Layer w6: P2.2 -829.9,293.5 -426,293.5 -397.3,322.2 -397.3,1852.8 -421.6,1877.1 -468.6,1877.1 -506.8,1915.3 -506.8,1989.6 P1.40
  Bottom Layer w10: RP3.3 -575.65,2008.75 P1.40
I2C_CLK: J1.6 P1.37 RP3.1 | length 2503.1
  Bottom Layer w10: J1.6 -1942.5,975 -1942.5,1421.5 -1268.8,2095.2 -734.1,2095.2 -720.57,2081.67 RP3.1 -708.93,2071.74 -690.55,2090.13 -450.01,2090.13 -410.27,2050.39 -410.27,1979.23 -450.8,1938.7 P1.37
I2C_DATA: J1.7 P1.38 RP3.4 | length 2218.9
  Bottom Layer w10: J1.7 -1904.5,938 -1904.5,1413 -1381.4,1936.1 -740.4,1936.1 -721.2,1955.3 -721.2,1976.63 RP3.4 -594.46,1977.26 P1.38
NetR1_1: R1.1 U1.99 | length 332.4
  Top Layer w10: v1(-1612.54,782.46) U1.99
  Bottom Layer w10: R1.1 -1678,619.5 -1650.5,647 -1650.5,744.5 v1(-1612.54,782.46)
OCK_INV: DIP-SW.16 RP1.1 U1.100 | length 1612
  Top Layer w10: v1@-1540.22,727.78 v1@-1537.25,730.75 ; U1.100 -1535.75,732.26 v1@-1537.25,730.75 ; v1(-1535.5,729) v1@-1537.25,730.75 ; v1@-1529.5,1394 v1(-1532.5,1391) -1532.5,1566 v4(-1207.5,1891) -1162.5,1936 -1057.5,1936 -1041.5,1952 DIP-SW.16
  Bottom Layer w10: v1(-1535.5,729) -1520.5,744 -1520.5,1379 v1(-1532.5,1391) ; RP1.1 -1209.24,1889.26 v4(-1207.5,1891)
ODCK: P1.27 U1.44 | length 624.8
  Top Layer w10: U1.44 U1.44@-941.02,1117.34 ; U1.44@-938.87,1119.5 U1.44@-941.02,1117.34 ; P1.27 -500.1,1384.3 -561.44,1384.3 -828.63,1117.11 -874.14,1117.11 -874.37,1117.34 U1.44@-941.02,1117.34
OVDD: BF3.2 C8.2 C9.2 C10.2 C11.2 C12.2 C13.2 U1.18 U1.29 U1.43 U1.57 U1.78 | length 2429.5
  Top Layer w10: v5@-1555,1276 v5(-1546.5,1276) -1523.09,1276 -1489.31,1242.22 -1489.31,1204.19 -1497.65,1195.85 U1.78 ; U1.18 -1140.08,636.07 v1(-1137.5,633.5) ; U1.57 -1120.39,1356.11 v1(-1118,1358.5) ; U1.29 v1(-893.34,821.83) ; U1.43 -940.33,1096.5 v1(-883,1096.5)
  Signal Layer 2 w20: v5@-1548.49,1277.99 -1490.51,1277.99 -1365.5,1403 -1125.5,1403 -1038,1315.5 -1038,1139 ; v1(-1137.5,633.5) -1137.5,690 -1038,789.5 -1038,913.5 ; v1(-1118,1358.5) -1118,1377.5 ; v1(-893.34,821.83) -946.34,821.83 -1038,913.5 ; v1(-883,1096.5) -995.5,1096.5 -1038,1139 ; -1038,913.5 -1038,1139
  Bottom Layer w10: C12.2 -1141.47,643.54 -1137.5,639.57 v1(-1137.5,633.5) ; C8.2 -1118,1391.46 v1(-1118,1358.5) ; v1(-893.34,821.83) -858.8,821.83 C11.2 ; v1(-883,1096.5) -850.47,1096.5 C10.2@-849.54,1097.43
  Bottom Layer w20: C13.2@-1656.44,1311.47 BF3.2 -1558.53,1276 v5(-1546.5,1276) -1563.5,1259 C9.2
P\D\: DIP-SW.10 RP2.3 U1.2 | length 1956
  Top Layer w10: U1.2 -1455.04,662.04 -1406.5,613.5 v1(-1382.5,613.5) ; v1@-1348.5,1438 v1(-1347.5,1439) -1347,1439.5 -1347,1494.5 -1093.5,1748 -877.5,1748 -812.5,1813 v4(-812.5,1890) -812.5,1891 -741.5,1962 DIP-SW.10
  Bottom Layer w10: v1(-1382.5,613.5) -1360.5,635.5 -1360.5,767.5 -1346.5,781.5 -1346.5,850.5 -1347.5,850.5 -1374.5,877.5 -1374.5,1400.5 -1348.5,1426.5 -1348.5,1438 v1(-1347.5,1439) ; RP2.3@-813.09,1874.36 RP2.3 -812.25,1889.75 v4(-812.5,1890)
P\D\O\: DIP-SW.11 RP2.2 U1.9 | length 1710.4
  Top Layer w10: v1(-1392.5,1438) -1392.5,1492 -1102.5,1782 -909.5,1782 -840.5,1851 v4@-840.5,1892 ; v1(-1375,840) -1317.24,782.24 U1.9 ; v4@-840.5,1895 -791.5,1944 DIP-SW.11
  Bottom Layer w10: v1(-1392.5,1438) -1393.5,1437 -1393.5,858.5 v1(-1375,840) ; RP2.2 -843.75,1890.75 v4(-842.5,1892)
PIXS: DIP-SW.13 RP1.4 U1.4 | length 1673.7
  Top Layer w10: v1(-1447,1445) -1447,1529.5 -1106.5,1870 -940.5,1870 -891.5,1919 DIP-SW.13 ; U1.4 -1415.66,763.47 -1412.16,766.97 -1412.16,815.16 v1(-1412.5,815.5)
  Bottom Layer w10: v1(-1447,1445) -1441.84,1439.84 -1441.84,1397.87 -1433.5,1389.52 -1433.5,836.5 v1(-1412.5,815.5) ; RP1.4 -1091.03,1872.53 v4(-1086.5,1868)
PVDD: BF2.2 C6.2 C7.2 U1.97 | length 427.3
  Top Layer w10: v1@-1588.84,821.83 U1.97
  Signal Layer 2 w20: v1(-1585.5,822.5) -1585.5,650 -1527.5,592 v5(-1527.5,590.5)
  Bottom Layer w20: C6.2 -1586,823 v1(-1585.5,822.5) ; BF2.2 C7.2@-1527.47,630.94
R0: P1.19 U1.30 | length 661
  Top Layer w10: U1.30 -975.01,841.52 -973.85,842.68 -884.7,842.68 -856.37,814.34 -732.96,814.34 -565.2,982.1 -502.3,982.1 P1.19
R1: P1.20 U1.31 | length 484.4
  Top Layer w10: U1.31 -880.6,861.2 -853.42,834.03 -750.37,834.03 P1.20
R2: P1.21 U1.32 | length 611.8
  Top Layer w10: U1.32 -732.39,880.89 -591.33,1021.96 -591.33,1050.39 -555.51,1086.2 -527.08,1086.2 -479.68,1133.6 P1.21
R3: P1.22 U1.33 | length 504.2
  Top Layer w10: U1.33 -754.43,900.57 -610.6,1044.4 -610.6,1073.8 P1.22
R4: P1.23 U1.34 | length 649.2
  Top Layer w10: U1.34 -772.04,920.26 -628.3,1064 -628.3,1113.41 -567.59,1174.13 -510.27,1174.13 P1.23
R5: P1.24 U1.35 | length 544.7
  Top Layer w10: U1.35 -788.86,939.94 -647.9,1080.9 -647.9,1136.5 P1.24
R6: P1.25 U1.36 | length 699.5
  Top Layer w10: U1.36 -802.97,959.63 -678.11,1084.49 -678.11,1176.99 -572.2,1282.9 -501.5,1282.9 P1.25
R7: P1.26 U1.37 | length 587.8
  Top Layer w10: U1.37 -818.69,979.32 -697.8,1100.2 -697.8,1186.6 P1.26
S\T\A\G\: DIP-SW.12 RP2.1 U1.7 | length 1701.8
  Top Layer w10: v1(-1421,1406.5) -1421,1518.13 -1099.13,1840 -908.5,1840 -871.5,1877 v4(-871.5,1895) -871.5,1917 -841.5,1947 DIP-SW.12 ; v1(-1373,808) -1356.61,791.61 U1.7
  Bottom Layer w10: v1(-1421,1406.5) -1412.5,1398 -1412.5,847.5 v1(-1373,808) ; RP2.1 -875.24,1891.26 v4(-871.5,1895)
SCDT: P1.34 U1.8 | length 1685.4
  Top Layer w10: U1.8 -1336.93,649.53 v4(-1336.2,648.8)
  Bottom Layer w10: v4(-1336.2,648.8) -1336.2,651.5 -1076.5,911.2 -1076.5,1154.5 -847,1384 -538.1,1384 -501.2,1420.9 -501.2,1684 P1.34
ST: DIP-SW.15 RP1.2 U1.3 | length 1654
  Top Layer w10: v1(-1500,1429.5) -1500,1568.5 -1151.5,1917 -1011.5,1917 -991.5,1937 DIP-SW.15 ; U1.3 -1435.35,773.65 v1(-1433,776)
  Bottom Layer w10: v1(-1500,1429.5) -1495.84,1433.66 -1495.84,1387.37 -1473.5,1365.02 -1473.5,810.5 -1439,776 v1(-1433,776) ; RP1.2 -1177.75,1889.75 v4(-1175.5,1892)
VSYNC: P1.33 U1.47 | length 835
  Top Layer w10: U1.47 -866.73,1176.17 -620.3,1422.6 -620.3,1533.8 -571.4,1582.7 -519.8,1582.7 -502.9,1599.6 -502.9,1682.4 -502,1682.4 P1.33
pads on no net: DIP-SW.9 J1.4 J1.5 J1.8 J1.12 J1.13 J1.14 J1.20 J1.21 J1.-1 J1.C1 J1.C2 J1.C3 J1.C4 P1.35 P1.36 RP2.4 U1.40 U1.41 U1.42 U1.49 U1.50 U1.51 U1.52 U1.53 U1.54 U1.55 U1.56 U1.59 U1.60 U1.61 U1.62 U1.63 U1.64 U1.65 U1.66 U1.69 U1.70 U1.71 U1.72 U1.73 U1.74 U1.75 U1.77 U1.96

## Polygon pours and split planes (outlines as drawn)
GND on Top Layer "Bottom Layer-No Net" (solid, remove dead copper, pour order 6): -2370,2127 -365.4,2127 -365.4,0 -2370,0
GND on Bottom Layer "Bottom Layer-No Net" (solid, remove dead copper, pour order 8): -2370,2127 -2370,0 -365.4,0 -365.4,2127
GND on Signal Layer 1 "Bottom Layer-No Net" (solid, remove dead copper, pour order 10): -2370,2127 -2370,0 -365.4,0 -365.4,2127

## Keep-outs
Keep-Out Layer:
  the board outline again, w10

## Other copper
Top Layer:
  pour cut-out: -985.05,711.91 -985.05,744.09 -966.09,744.09 -965.5,743.5 -965.5,712.5
  pour cut-out: -1698.5,1372.9 -1678.1,1372.9 -1676.8,1371.6 -1676.8,1346.1 -1699.8,1346.1

## Silkscreen, mask and mechanical layers (free items; w line width, h text height)
Top Overlay:
  text "OCK_INV" at -1688.5,2041 h60 r270
  text "ST" at -1618.5,2041 h60 r270
  text "DFO" at -1548.5,2041 h60 r270
  text "PIXS" at -1478.5,2041 h60 r270
  text "STAG#" at -1408.5,2041 h60 r270
  text "PDO#" at -1338.5,2041 h60 r270
  text "PD#" at -1268.5,2041 h60 r270
  text "N.C." at -1198.5,2041 h60 r270
  text "DVI Input" at -1839.1,439.2 h200
  text "Revision: 1.3" at -1494.7,343 h60

## Text inside footprints (layer, text, board x,y; h text height)
P1: Top Overlay "1" at -430.8,33.6 h50 r90; Top Overlay "2" at -530.8,33.6 h50 r90